# EAGLE board BadgeBoard (EAGLE 7.5.0)
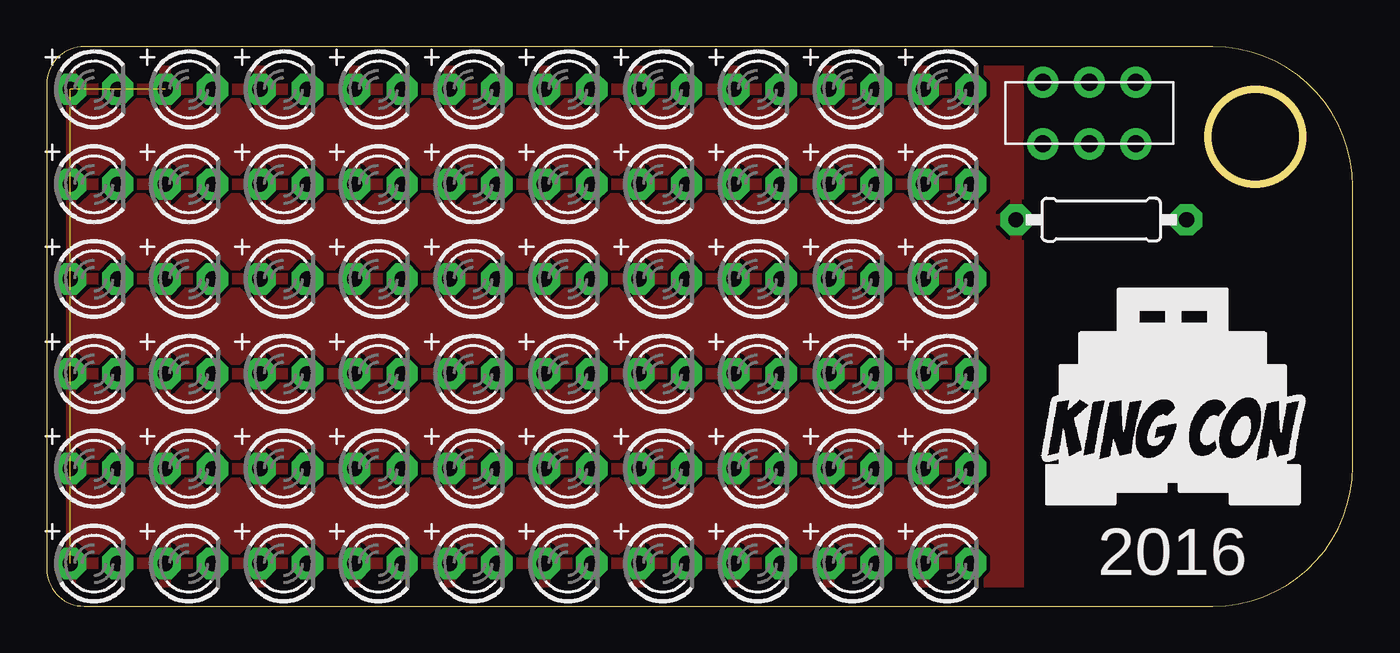
[diagram p0: board, top side]
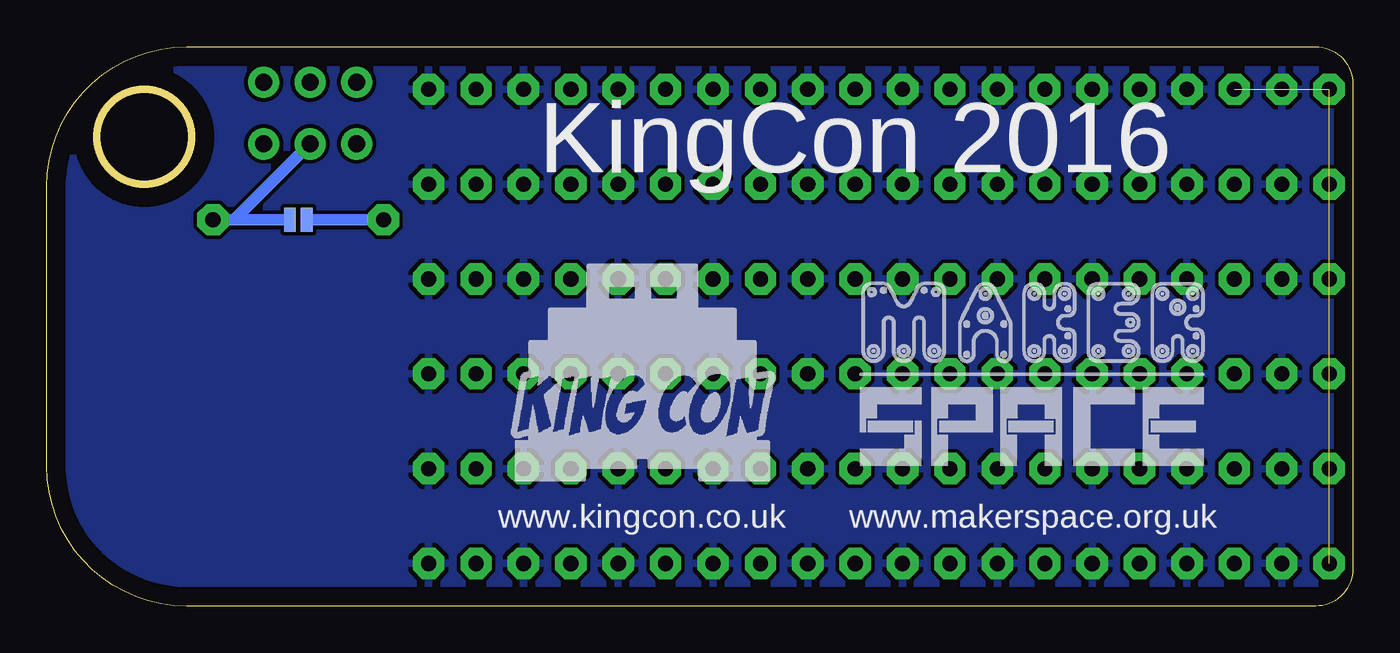
[diagram p1: board, bottom side, seen from below]

Size 70 x 29.97 mm. Coordinates in mm from the lower left corner, seen from the top.
Outline: 62.5,29.97 2,29.97 arc90 0,27.97 0,2 arc90 2,0 62.5,0 arc90 70,7.5 70,22.47 arc90 62.5,29.97
Outline: circle at 64.77,25.15 radius 2.54
Copper layers (1*16): Top 0.035mm / dielectric 1.5mm / Bottom 0.035mm
Design rules "default": minimum track width 10mil, minimum drill 24mil, track to track 8mil, track to pad 8mil, pad to pad 8mil, via to via 8mil, smd to smd 8mil, copper to edge 40mil, drill to drill 8mil, minimum pad ring 10mil, minimum via ring 8mil, stop-mask expansion 4mil, vias tented up to drill 0mil, thermal gap 10mil

## Footprints (pad centres in the part's own frame; a part is rotated, then mirrored left to right if it is on the bottom)
PAD-JUMPER-2-NO_NO_SILK = smd 0.635 x 1.27: 1 -0.45,0; 2 0.45,0
LED3MM = drill 0.813 pad 1.676 octagon: A -1.27,0; K 1.27,0
0207/9 = drill 0.813 pad 1.676 octagon: 1 -4.572,0; 2 4.572,0
JS202011CQN = drill 0.9 pad 1.676: 1 -2.489,-1.651; 2 0,-1.651; 3 2.489,-1.651; 4 -2.489,1.651; 5 0,1.651; 6 2.489,1.651

## Placement (x,y rotation side)
JP1  JUMPER-PAD-2-NO  [PAD-JUMPER-2-NO_NO_SILK]  56.52,20.7 0 bottom
LED1  [LED3MM]  2.54,2.29 0 top
LED2  [LED3MM]  2.54,7.37 0 top
LED3  [LED3MM]  2.54,12.45 0 top
LED4  [LED3MM]  2.54,17.53 0 top
LED5  [LED3MM]  2.54,22.61 0 top
LED6  [LED3MM]  2.54,27.69 0 top
LED7  [LED3MM]  7.62,2.29 0 top
LED8  [LED3MM]  7.62,7.37 0 top
LED9  [LED3MM]  12.7,2.29 0 top
LED10  [LED3MM]  7.62,22.61 0 top
LED11  [LED3MM]  22.86,2.29 0 top
LED12  [LED3MM]  7.62,12.45 0 top
LED13  [LED3MM]  17.78,2.29 0 top
LED14  [LED3MM]  7.62,27.69 0 top
LED15  [LED3MM]  7.62,17.53 0 top
LED16  [LED3MM]  12.7,7.37 0 top
LED17  [LED3MM]  12.7,12.45 0 top
LED18  [LED3MM]  22.86,27.69 0 top
LED19  [LED3MM]  12.7,17.53 0 top
LED20  [LED3MM]  12.7,22.61 0 top
LED21  [LED3MM]  12.7,27.69 0 top
LED22  [LED3MM]  22.86,22.61 0 top
LED23  [LED3MM]  22.86,17.53 0 top
LED24  [LED3MM]  22.86,12.45 0 top
LED25  [LED3MM]  22.86,7.37 0 top
LED26  [LED3MM]  17.78,27.69 0 top
LED27  [LED3MM]  17.78,22.61 0 top
LED28  [LED3MM]  17.78,17.53 0 top
LED29  [LED3MM]  17.78,12.45 0 top
LED30  [LED3MM]  17.78,7.37 0 top
LED31  [LED3MM]  38.1,27.69 0 top
LED32  [LED3MM]  33.02,22.61 0 top
LED33  [LED3MM]  27.94,27.69 0 top
LED34  [LED3MM]  38.1,22.61 0 top
LED35  [LED3MM]  33.02,17.53 0 top
LED36  [LED3MM]  27.94,22.61 0 top
LED37  [LED3MM]  38.1,17.53 0 top
LED38  [LED3MM]  33.02,12.45 0 top
LED39  [LED3MM]  27.94,17.53 0 top
LED40  [LED3MM]  38.1,12.45 0 top
LED41  [LED3MM]  33.02,7.37 0 top
LED42  [LED3MM]  27.94,12.45 0 top
LED43  [LED3MM]  38.1,7.37 0 top
LED44  [LED3MM]  33.02,2.29 0 top
LED45  [LED3MM]  27.94,7.37 0 top
LED46  [LED3MM]  38.1,2.29 0 top
LED47  [LED3MM]  33.02,27.69 0 top
LED48  [LED3MM]  27.94,2.29 0 top
LED49  [LED3MM]  43.18,27.69 0 top
LED50  [LED3MM]  43.18,22.61 0 top
LED51  [LED3MM]  43.18,17.53 0 top
LED52  [LED3MM]  48.26,12.45 0 top
LED53  [LED3MM]  48.26,27.69 0 top
LED54  [LED3MM]  43.18,12.45 0 top
LED55  [LED3MM]  48.26,7.37 0 top
LED56  [LED3MM]  48.26,22.61 0 top
LED57  [LED3MM]  43.18,7.37 0 top
LED58  [LED3MM]  48.26,2.29 0 top
LED59  [LED3MM]  48.26,17.53 0 top
LED60  [LED3MM]  43.18,2.29 0 top
R1  [0207/9]  56.52,20.7 180 top
U$1  [KINGCON_LOGO_L]  52.7,3.56 0 top
U$2  [MAKERSPACE_LOGO_FULL_M]  26.67,7.37 0 bottom
U$3  [KINGCON_LOGO_L]  45.72,4.83 0 bottom
U$4  JS202011CQN  [JS202011CQN]  55.88,26.42 0 top

## Library data of the parts
JP1 = SparkFun-Passives
LED1-LED60 R1 = adafruit
U$1 = KingCon_Logo
U$2 U$3 = logos
U$4 = switch

## Nets
GND: LED1.K LED2.K LED3.K LED4.K LED5.K LED6.K LED7.K LED8.K LED9.K LED10.K LED11.K LED12.K LED13.K LED14.K LED15.K LED16.K LED17.K LED18.K LED19.K LED20.K LED21.K LED22.K LED23.K LED24.K LED25.K LED26.K LED27.K LED28.K LED29.K LED30.K LED31.K LED32.K LED33.K LED34.K LED35.K LED36.K LED37.K LED38.K LED39.K LED40.K LED41.K LED42.K LED43.K LED44.K LED45.K LED46.K LED47.K LED48.K LED49.K LED50.K LED51.K LED52.K LED53.K LED54.K LED55.K LED56.K LED57.K LED58.K LED59.K LED60.K
SW_BATT: JP1.1 R1.1 U$4.2
VBATT: U$4.3
VLED: JP1.2 LED1.A LED2.A LED3.A LED4.A LED5.A LED6.A LED7.A LED8.A LED9.A LED10.A LED11.A LED12.A LED13.A LED14.A LED15.A LED16.A LED17.A LED18.A LED19.A LED20.A LED21.A LED22.A LED23.A LED24.A LED25.A LED26.A LED27.A LED28.A LED29.A LED30.A LED31.A LED32.A LED33.A LED34.A LED35.A LED36.A LED37.A LED38.A LED39.A LED40.A LED41.A LED42.A LED43.A LED44.A LED45.A LED46.A LED47.A LED48.A LED49.A LED50.A LED51.A LED52.A LED53.A LED54.A LED55.A LED56.A LED57.A LED58.A LED59.A LED60.A R1.2

## Tracks (layer width: path | path; a pad name or v marks a point on that pad's centre or on a via)
GND
  pour Bottom: 0,30.23 69.85,30.23 69.85,-0.25 0,-0.25
SW_BATT
  Bottom 0.61: JP1.1 R1.1 59.94,20.7 U$4.2
VLED  (6 unrouted)
  Bottom 0.61: JP1.2 R1.2
  pour Top: 0,30.23 52.07,30.23 52.07,-0.25 0,-0.25

## Text on the board
tNames: 2016
bNames: KingCon 2016 | www.makerspace.org.uk | www.kingcon.co.uk